# EAGLE board CT_schematic (EAGLE 7.6.0)

Size 100 x 80 mm. Coordinates in mm from the lower left corner, seen from the top.
Outline: 0,0 100,0 100,80 0,80 0,0
Copper layers (1*16): Top 0.035mm / dielectric 1.5mm / Bottom 0.035mm
Design rules "default": minimum track width 10mil, minimum drill 24mil, track to track 8mil, track to pad 8mil, pad to pad 8mil, via to via 8mil, smd to smd 8mil, copper to edge 40mil, drill to drill 8mil, minimum pad ring 10mil, minimum via ring 8mil, stop-mask expansion 4mil, vias tented up to drill 0mil, thermal gap 10mil

## Footprints (pad centres in the part's own frame; a part is rotated, then mirrored left to right if it is on the bottom)
C0603 = smd 0.8 x 0.8: 1 -0.762,0; 2 0.762,0
C0402 = smd 0.5 x 0.5: 1 -0.508,0; 2 0.508,0
C0805 = smd 1.2 x 1.3: 1 -1.016,0; 2 1.016,0
C1206 = smd 1.3 x 1.6: 1 -1.524,0; 2 1.524,0
L0603 = smd 0.8 x 0.8: 1 -0.762,0; 2 0.762,0
L0805 = smd 1.2 x 1.3: 1 -1.016,0; 2 1.016,0
R0603 = smd 0.8 x 0.8: 1 -0.762,0; 2 0.762,0
LQFP64 = smd 0.3 x 1.2: 1 -3.75,-5.75; 2 -3.25,-5.75; 3 -2.75,-5.75; 4 -2.25,-5.75; 5 -1.75,-5.75; 6 -1.25,-5.75; 7 -0.75,-5.75; 8 -0.25,-5.75; 9 0.25,-5.75; 10 0.75,-5.75; 11 1.25,-5.75; 12 1.75,-5.75; 13 2.25,-5.75; 14 2.75,-5.75; 15 3.25,-5.75; 16 3.75,-5.75; 33 3.75,5.75; 34 3.25,5.75; 35 2.75,5.75; 36 2.25,5.75; 37 1.75,5.75; 38 1.25,5.75; 39 0.75,5.75; 40 0.25,5.75; 41 -0.25,5.75; 42 -0.75,5.75; 43 -1.25,5.75; 44 -1.75,5.75; 45 -2.25,5.75; 46 -2.75,5.75; 47 -3.25,5.75; 48 -3.75,5.75 | smd 1.2 x 0.3: 17 5.75,-3.75; 18 5.75,-3.25; 19 5.75,-2.75; 20 5.75,-2.25; 21 5.75,-1.75; 22 5.75,-1.25; 23 5.75,-0.75; 24 5.75,-0.25; 25 5.75,0.25; 26 5.75,0.75; 27 5.75,1.25; 28 5.75,1.75; 29 5.75,2.25; 30 5.75,2.75; 31 5.75,3.25; 32 5.75,3.75; 49 -5.75,3.75; 50 -5.75,3.25; 51 -5.75,2.75; 52 -5.75,2.25; 53 -5.75,1.75; 54 -5.75,1.25; 55 -5.75,0.75; 56 -5.75,0.25; 57 -5.75,-0.25; 58 -5.75,-0.75; 59 -5.75,-1.25; 60 -5.75,-1.75; 61 -5.75,-2.25; 62 -5.75,-2.75; 63 -5.75,-3.25; 64 -5.75,-3.75
TST-110-05-T-D-RA = drill 1 pad 1.7 square: 1 0,0 | drill 1 pad 1.7: 2 0,2.54; 3 2.54,0; 4 2.54,2.54; 5 5.08,0; 6 5.08,2.54; 7 7.62,0; 8 7.62,2.54; 9 10.16,0; 10 10.16,2.54; 11 12.7,0; 12 12.7,2.54; 13 15.24,0; 14 15.24,2.54; 15 17.78,0; 16 17.78,2.54; 17 20.32,0; 18 20.32,2.54; 19 22.86,0; 20 22.86,2.54
TSSOP20-I = smd 0.4 x 1.35: 1 -2.925,-2.875; 2 -2.275,-2.875; 3 -1.625,-2.875; 4 -0.975,-2.875; 5 -0.325,-2.875; 6 0.325,-2.875; 7 0.975,-2.875; 8 1.625,-2.875; 9 2.275,-2.875; 10 2.925,-2.875; 11 2.925,2.875; 12 2.275,2.875; 13 1.625,2.875; 14 0.975,2.875; 15 0.325,2.875; 16 -0.325,2.875; 17 -0.975,2.875; 18 -1.625,2.875; 19 -2.275,2.875; 20 -2.925,2.875
HTSS-105-01-G-D = drill 1 pad 1.8 square: 1 0,0 | drill 1 pad 1.8: 2 0,2.54; 3 2.54,0; 4 2.54,2.54; 5 5.08,0; 6 5.08,2.54; 7 7.62,0; 8 7.62,2.54; 9 10.16,0; 10 10.16,2.54
XB24CZ7UIS-004 = smd 2.84 x 1.52: 1 -10,6; 2 -10,4; 3 -10,2; 4 -10,0; 5 -10,-2; 6 -10,-4; 7 -10,-6; 8 -10,-8; 9 -10,-10; 10 -10,-12; 11 -10,-14; 12 -10,-16; 13 -10,-18; 21 10,-18; 22 10,-16; 23 10,-14; 24 10,-12; 25 10,-10; 26 10,-8; 27 10,-6; 28 10,-4; 29 10,-2; 30 10,0; 31 10,2; 32 10,4; 33 10,6; 34 10,8; 35 10,10; 36 10,12; 37 10,14 | smd 1.52 x 2.84: 14 -6,-19.68; 15 -4,-19.68; 16 -2,-19.68; 17 0,-19.68; 18 2,-19.68; 19 4,-19.68; 20 6,-19.68
ABS07-32.768KHZ-7-T = smd 1.1 x 2.4: 1 -2.5,0; 2 0,0
ABLS-25.000MHZ-B2F-T = smd 5.6 x 2.8: 1 -3.81,0; 2 5.69,0
TSOT-23-5 = smd 1.3 x 0.62: 1 -1.31,0.95; 2 -1.31,0; 3 -1.31,-0.95; 4 1.31,-0.95; 5 1.31,0.95
DFN8_2X3MC = smd 0.813 x 0.305: 1 -1.398,0.75; 2 -1.398,0.25; 3 -1.398,-0.25; 4 -1.398,-0.75; 5 1.398,-0.75; 6 1.398,-0.25; 7 1.398,0.25; 8 1.398,0.75 | smd 1.753 x 1.549: 9 0,0
JST-2-SMD = smd 1 x 4.6: 1 -1,-3.7; 2 1,-3.7 | smd 1.6 x 3.4: NC1 -3.4,1.5; NC2 3.4,1.5
FCI_10118193-0001LF = smd 0.4 x 1.35: 1 -1.3,2.675; 2 -0.65,2.675; 3 0,2.675; 4 0.65,2.675; 5 1.3,2.675 | smd 1.6 x 1.4: 6 -3.2,2.45; 7 3.2,2.45 | smd 1.9 x 1.9: 8 -1.2,0; 9 1.2,0 | hole 0.5: -3.3,0; 3.3,0
SON-6 = smd 0.55 x 0.3: 1 -0.355,0.5 | smd 0.52 x 0.3: 2 -0.37,0; 3 -0.37,-0.5; 4 0.37,-0.5; 5 0.37,0; 6 0.37,0.5
SW_4-1437565-2 = smd 1.4 x 2.1: 1 -2.23,4.55; 2 -2.23,-4.55; 3 2.23,4.55; 4 2.23,-4.55
LGM67K-G1J2-24-Z = smd 0.8 x 1.4: A -2,0; C 0,0
NC7SZ125M5X = smd 1.3 x 0.7: 1 -1.3,0.95; 2 -1.3,0; 3 -1.3,-0.95; 4 1.3,-0.95; 5 1.3,0.95
DUMMY_PACKAGE_154 = drill 0.3: 1 0,-1; 2 1.5,-1; 3 3,-1

## Placement (x,y rotation side)
C1  1e-06  [C0603]  -57.15,74.93 0 top  (outside the outline)
C2  1e-07  [C0603]  -60.96,74.93 0 top  (outside the outline)
C3  1e-07  [C0603]  -64.77,74.93 0 top  (outside the outline)
C4  1e-07  [C0603]  -68.58,74.93 0 top  (outside the outline)
C5  1e-07  [C0603]  -72.39,74.93 0 top  (outside the outline)
C6  1e-07  [C0603]  -15.24,80.01 0 top  (outside the outline)
C7  4.7e-06  [C0603]  -49.53,74.93 0 top  (outside the outline)
C8  1e-08  [C0603]  -19.05,80.01 0 top  (outside the outline)
C9  1e-08  [C0603]  -22.86,80.01 0 top  (outside the outline)
C10  1e-06  [C0603]  -26.67,80.01 0 top  (outside the outline)
C11  1e-11  [C0402]  -58.42,80.01 0 top  (outside the outline)
C12  1e-11  [C0402]  -62.23,80.01 0 top  (outside the outline)
C13  1e-11  [C0402]  -66.04,80.01 0 top  (outside the outline)
C14  1e-11  [C0402]  -69.85,80.01 0 top  (outside the outline)
C15  1e-07  [C0402]  -73.66,80.01 0 top  (outside the outline)
C16  1e-07  [C0402]  -15.24,85.09 0 top  (outside the outline)
C17  1e-07  [C0402]  -19.05,85.09 0 top  (outside the outline)
C18  1e-07  [C0402]  -22.86,85.09 0 top  (outside the outline)
C19  1e-07  [C0402]  -26.67,85.09 0 top  (outside the outline)
C20  1e-07  [C0402]  -30.48,85.09 0 top  (outside the outline)
C21  1e-07  [C0402]  -34.29,85.09 0 top  (outside the outline)
C22  1e-07  [C0402]  -38.1,85.09 0 top  (outside the outline)
C23  1e-05  [C0805]  -15.24,69.85 0 top  (outside the outline)
C24  1e-07  [C0402]  -41.91,85.09 0 top  (outside the outline)
C25  4.7e-11  [C0402]  -54.61,80.01 0 top  (outside the outline)
C26  8.2e-12  [C0603]  -53.34,74.93 0 top  (outside the outline)
C27  1e-05  [C0805]  -20.32,69.85 0 top  (outside the outline)
C28  1e-05  [C0805]  -25.4,69.85 0 top  (outside the outline)
C29  1e-07  [C0402]  -45.72,85.09 0 top  (outside the outline)
C30  1e-05  [C1206]  -48.26,62.23 0 top  (outside the outline)
C31  1e-05  [C1206]  -54.61,62.23 0 top  (outside the outline)
C32  1e-08  [C0402]  -49.53,85.09 0 top  (outside the outline)
C33  1e-08  [C0402]  -53.34,85.09 0 top  (outside the outline)
C34  1e-08  [C0402]  -57.15,85.09 0 top  (outside the outline)
F1  240.0  [L0603]  -30.48,80.01 0 top  (outside the outline)
I1  2.2e-06  [L0805]  -30.48,69.85 0 top  (outside the outline)
R2  1000.0  [R0603]  -34.29,80.01 0 top  (outside the outline)
R4  4700.0  [R0603]  -38.1,80.01 0 top  (outside the outline)
R5  4700.0  [R0603]  -41.91,80.01 0 top  (outside the outline)
R6  10000.0  [R0603]  -63.5,69.85 0 top  (outside the outline)
R7  10000.0  [R0603]  -68.58,69.85 0 top  (outside the outline)
R8  10000.0  [R0603]  -73.66,69.85 0 top  (outside the outline)
R9  10000.0  [R0603]  -15.24,74.93 0 top  (outside the outline)
R10  10000.0  [R0603]  -20.32,74.93 0 top  (outside the outline)
R11  10000.0  [R0603]  -25.4,74.93 0 top  (outside the outline)
R12  10000.0  [R0603]  -30.48,74.93 0 top  (outside the outline)
R13  220000.0  [R0603]  -48.26,69.85 0 top  (outside the outline)
R14  1000000.0  [R0603]  -43.18,69.85 0 top  (outside the outline)
R15  10000.0  [R0603]  -35.56,74.93 0 top  (outside the outline)
R16  10000.0  [R0603]  -40.64,74.93 0 top  (outside the outline)
R17  9100.0  [R0603]  -45.72,80.01 0 top  (outside the outline)
R18  680000.0  [R0603]  -53.34,69.85 0 top  (outside the outline)
R19  120000.0  [R0603]  -58.42,69.85 0 top  (outside the outline)
R20  2000.0  [R0603]  -49.53,80.01 0 top  (outside the outline)
R21  10000.0  [R0603]  -45.72,74.93 0 top  (outside the outline)
U1  STM32F101R4T6  [LQFP64]  -49.53,7.62 0 top  (outside the outline)
U2  TST-110-05-T-D-RA  [TST-110-05-T-D-RA]  -46.99,53.34 0 top  (outside the outline)
U3  SP3203ECY-L/TR  [TSSOP20-I]  -24.13,45.72 0 top  (outside the outline)
U4  HTSS-105-01-G-D  [HTSS-105-01-G-D]  -58.42,43.18 0 top  (outside the outline)
U5  XB24CZ7UIS-004  [XB24CZ7UIS-004]  -25.4,21.59 0 top  (outside the outline)
U6  ABS07-32.768KHZ-7-T  [ABS07-32.768KHZ-7-T]  -27.94,63.5 0 top  (outside the outline)
U7  ABLS-25.000MHZ-B2F-T  [ABLS-25.000MHZ-B2F-T]  -62.23,55.88 0 top  (outside the outline)
U8  ltc3406es5  [TSOT-23-5]  -35.56,68.58 0 top  (outside the outline)
U9  MCP73831T-2ACI/MC  [DFN8_2X3MC]  -72.39,83.82 0 top  (outside the outline)
U10  S2B-PH-SM4-TB(LF)(SN)  [JST-2-SMD]  -38.1,45.72 0 top  (outside the outline)
U11  10118193-0001LF  [FCI_10118193-0001LF]  -67.31,43.18 0 top  (outside the outline)
U12  TPS3895ADRYR  [SON-6]  -66.04,83.82 0 top  (outside the outline)
U13  4-1437565-2  [SW_4-1437565-2]  -71.12,6.35 0 top  (outside the outline)
U14  Q65110A2395  [LGM67K-G1J2-24-Z]  -36.83,63.5 0 top  (outside the outline)
U15  nc7sz125m5x  [NC7SZ125M5X]  -59.69,62.23 0 top  (outside the outline)
U16  nc7sz125m5x  [NC7SZ125M5X]  -66.04,62.23 0 top  (outside the outline)
U17  nc7sz125m5x  [NC7SZ125M5X]  -72.39,62.23 0 top  (outside the outline)
U18  Dummy  [DUMMY_PACKAGE_154]  -63.5,85.09 0 top  (outside the outline)

## Library data of the parts
C1-C34 F1 I1 R2 R4-R21 U1-U18 = circuit_tree

## Nets
CLK_CRYSTAL_U1_3: C11.1 U1.3 U6.1
CLK_CRYSTAL_U1_4: C12.1 U1.4 U6.2
CLK_CRYSTAL_U1_5: C13.1 U1.5 U7.1
CLK_CRYSTAL_U1_6: C14.1 U1.6 U7.2
GND: C1.2 C2.2 C3.2 C4.2 C5.2 C6.2 C7.2 C8.2 C9.2 C10.2 C11.2 C12.2 C13.2 C14.2 C15.2 C16.2 C17.2 C18.2 C21.2 C22.2 C23.2 C24.2 C25.2 C26.2 C27.2 C28.1 C28.2 C29.2 C30.2 C31.2 C32.2 C33.2 C34.2 R2.2 R6.2 R12.2 R13.2 R17.2 R19.2 R20.2 U1.12 U1.18 U1.31 U1.47 U1.63 U2.4 U2.6 U2.8 U2.10 U2.12 U2.14 U2.16 U2.18 U2.20 U3.18 U4.9 U5.1 U5.11 U5.13 U5.22 U5.35 U8.2 U9.6 U9.9 U10.2 U11.5 U11.6 U11.7 U11.8 U11.9 U12.2 U14.C U15.2 U15.3 U16.1 U16.3 U17.1 U17.3 U18.1
INPUT_USBPOWER_5V: C30.1 R21.2 U9.1 U9.2 U11.1
NET_U1_7: R5.1 U1.7 U17.4
NET_U1_13: C8.1 C9.1 C10.1 F1.1 U1.13
NET_U1_60: R6.1 U1.60
NET_U1_61: U14.A
NET_U1_62: U13.3 U13.4
NET_U2_3: R7.1 U2.3
NET_U2_7: R9.1 U2.7
NET_U2_9: R10.1 U2.9
NET_U2_19: R12.1 U2.19
NET_U3_1: C19.1 U3.1
NET_U3_2: C21.1 U3.2
NET_U3_3: C19.2 U3.3
NET_U3_4: C20.1 U3.4
NET_U3_5: C20.2 U3.5
NET_U3_6: C22.1 U3.6
NET_U3_20: U3.20
NET_U4_3: U3.14 U4.3
NET_U4_4: U3.13 U4.4
NET_U4_5: U3.17 U4.5
NET_U4_6: U3.16 U4.6
NET_U5_6: R4.1 U5.6 U16.4
NET_U8_1: U8.1
NET_U8_3: I1.1 U8.3
NET_U8_5: R13.1 R14.1 U8.5
NET_U8_ATNET_3: I1.2 R14.2
NET_U9_5: R21.1 U9.5
NET_U9_8: R20.1 U9.8
NET_U12_1: R16.1 R17.1 U12.1
NET_U12_3: R18.2 R19.1 U12.3
NET_U12_4: R15.1 U12.4 U15.4 U16.2 U17.2
NET_U13_1: R2.1 U13.1 U13.2
PROC_ADC1_IN2: U1.16 U18.3
PROC_ADC1_IN3: U1.17 U18.2
PROC_SPI1_MISO: U1.22 U5.17
PROC_SPI1_MOSI: U1.23 U5.16
PROC_SPI1_NSS: U1.20 U5.15
PROC_SPI1_SCK: U1.21 U5.14
PROC_SYS_JTDI: R8.1 U1.50 U2.5
PROC_SYS_JTDO_TRACESWO: U1.55 U2.13
PROC_USART1_CTS: U1.44 U3.8
PROC_USART1_RX: U1.43 U3.11
PROC_USART1_TX: U1.42 U3.7
RST_OUT_U2_SRESET_B: R11.1 U2.15 U15.1
VCC_S1_3V7: C27.1 C31.1 U8.4 U9.3 U9.4 U10.1
VCC_TIER1_3V3: C1.1 C2.1 C3.1 C4.1 C5.1 C6.1 C7.1 C15.1 C16.1 C17.1 C18.1 C23.1 C24.1 C25.1 C26.1 C28.2 C29.1 C32.1 C33.1 C34.1 F1.2 I1.2 R4.2 R5.2 R7.2 R8.2 R9.2 R10.2 R11.2 R14.2 R15.2 R16.2 R18.1 U1.1 U1.19 U1.32 U1.48 U1.64 U2.1 U2.2 U3.12 U3.19 U5.2 U5.27 U12.6 U15.5 U16.5 U17.5

## Tracks (layer width: path | path; a pad name or v marks a point on that pad's centre or on a via)
CLK_CRYSTAL_U1_3  (2 unrouted)
CLK_CRYSTAL_U1_4  (2 unrouted)
CLK_CRYSTAL_U1_5  (2 unrouted)
CLK_CRYSTAL_U1_6  (2 unrouted)
GND  (78 unrouted)
INPUT_USBPOWER_5V  (4 unrouted)
NET_U1_7  (2 unrouted)
NET_U1_13  (4 unrouted)
NET_U1_60  (1 unrouted)
NET_U1_62  (1 unrouted)
NET_U2_3  (1 unrouted)
NET_U2_7  (1 unrouted)
NET_U2_9  (1 unrouted)
NET_U2_19  (1 unrouted)
NET_U3_1  (1 unrouted)
NET_U3_2  (1 unrouted)
NET_U3_3  (1 unrouted)
NET_U3_4  (1 unrouted)
NET_U3_5  (1 unrouted)
NET_U3_6  (1 unrouted)
NET_U4_3  (1 unrouted)
NET_U4_4  (1 unrouted)
NET_U4_5  (1 unrouted)
NET_U4_6  (1 unrouted)
NET_U5_6  (2 unrouted)
NET_U8_3  (1 unrouted)
NET_U8_5  (2 unrouted)
NET_U8_ATNET_3  (1 unrouted)
NET_U9_5  (1 unrouted)
NET_U9_8  (1 unrouted)
NET_U12_1  (2 unrouted)
NET_U12_3  (2 unrouted)
NET_U12_4  (4 unrouted)
NET_U13_1  (2 unrouted)
PROC_ADC1_IN2  (1 unrouted)
PROC_ADC1_IN3  (1 unrouted)
PROC_SPI1_MISO  (1 unrouted)
PROC_SPI1_MOSI  (1 unrouted)
PROC_SPI1_NSS  (1 unrouted)
PROC_SPI1_SCK  (1 unrouted)
PROC_SYS_JTDI  (2 unrouted)
PROC_SYS_JTDO_TRACESWO  (1 unrouted)
PROC_USART1_CTS  (1 unrouted)
PROC_USART1_RX  (1 unrouted)
PROC_USART1_TX  (1 unrouted)
RST_OUT_U2_SRESET_B  (2 unrouted)
VCC_S1_3V7  (5 unrouted)
VCC_TIER1_3V3  (47 unrouted)